# Altium PCB Peltier_activation_board.PcbDoc
Units mil, origin at the board's own origin, x right, y up, seen from the top; angles counter-clockwise.
Board outline 3150 x 3940 mil, 2 copper layers (Top Layer, Bottom Layer); 43 components, 27 nets, 108 pads, 0 vias.
Unrouted connection lines stored in the file: 2.
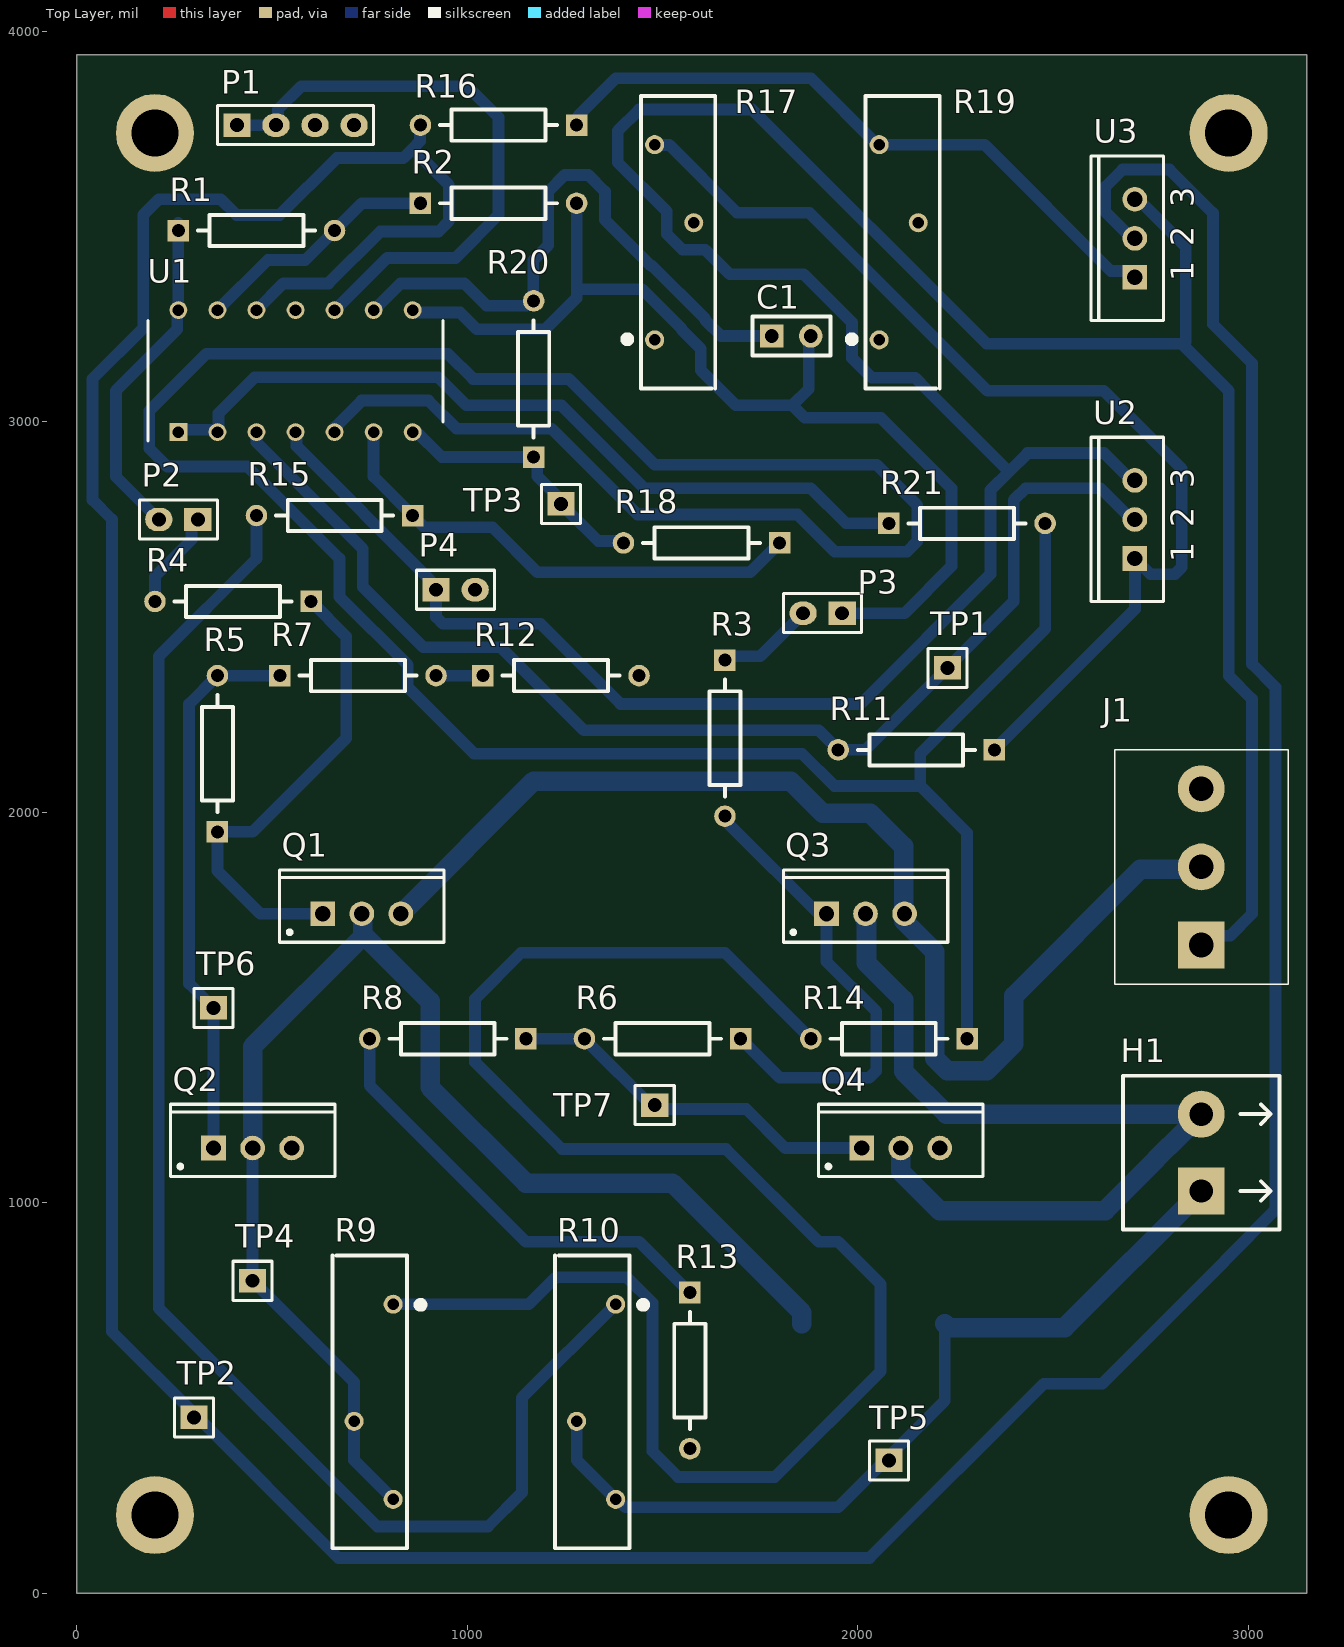
[diagram p0: Top Layer view]
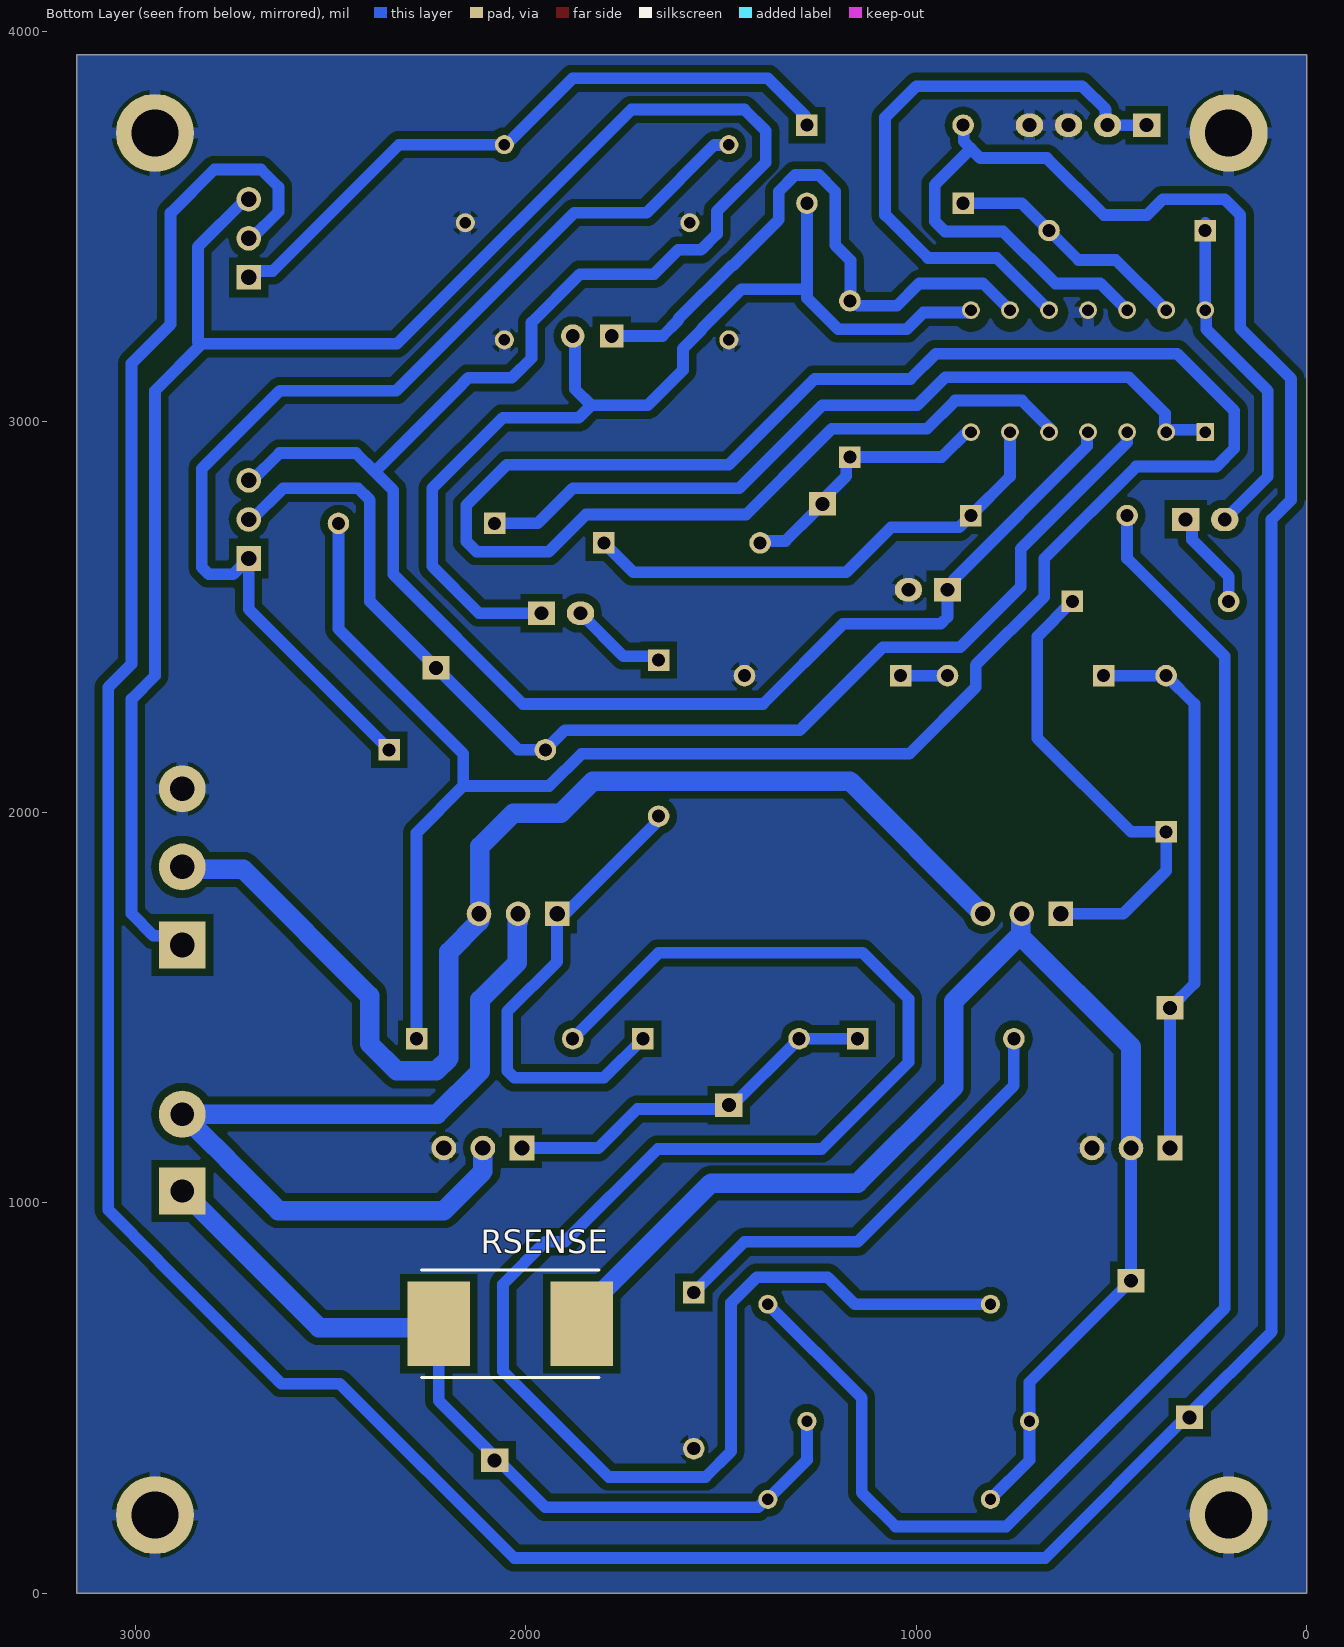
[diagram p1: Bottom Layer view, seen from below]
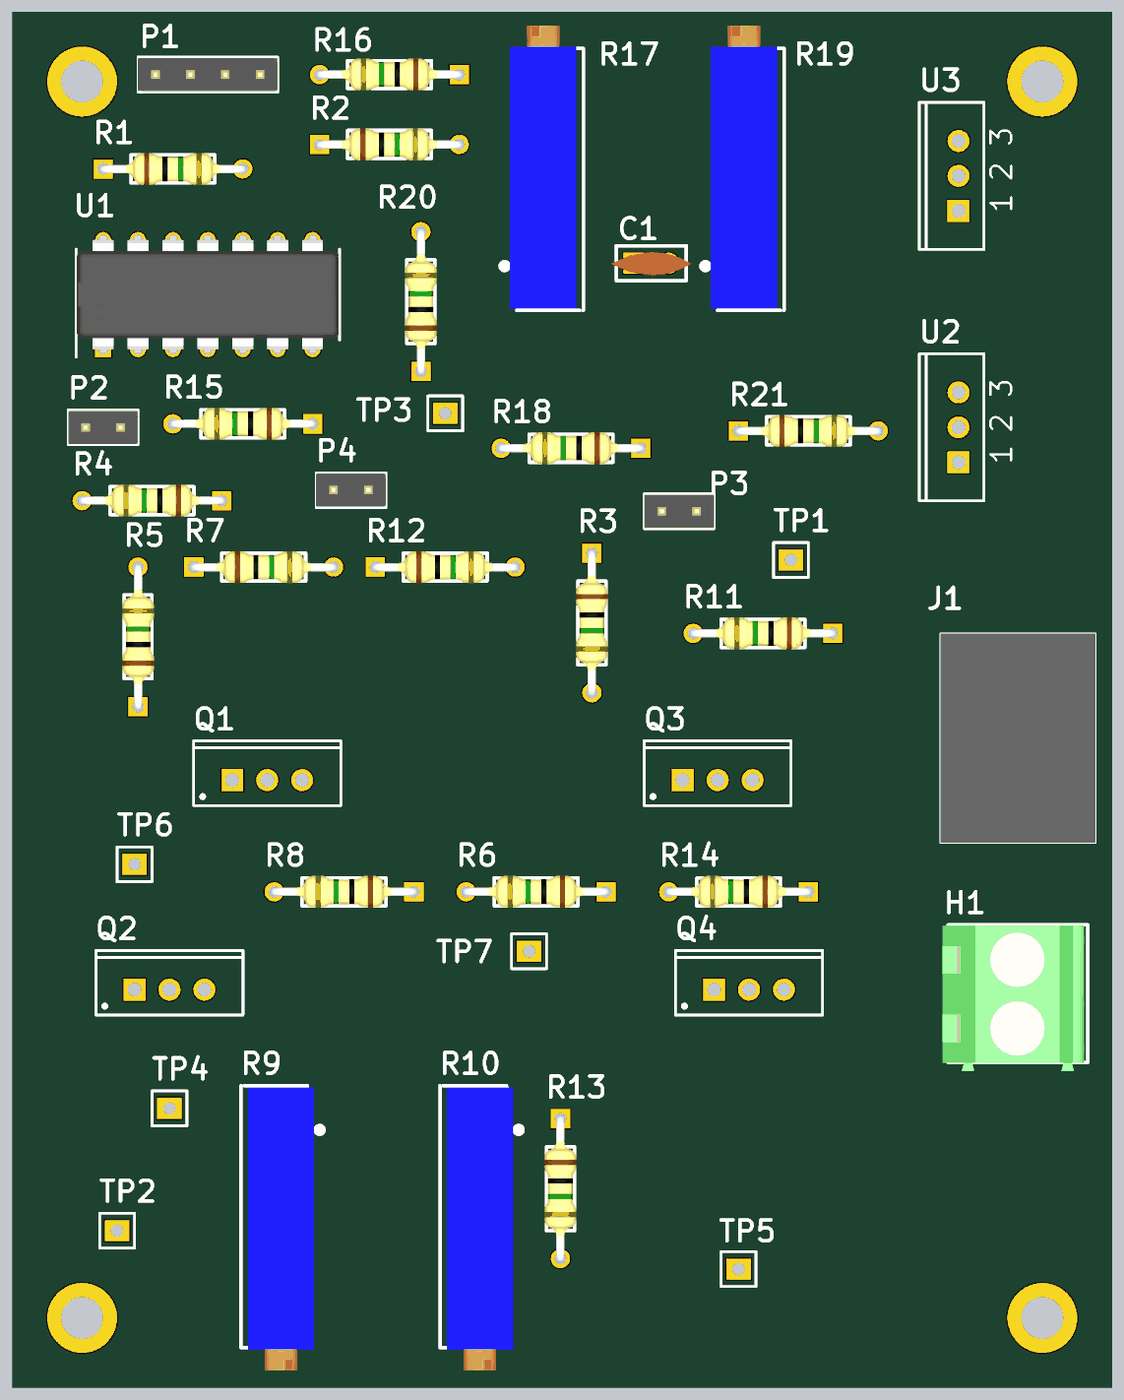
[diagram p2: 3D render of the assembled board from above, using the file's embedded part models]

## Layer stack, top to bottom
Top Solder: solder mask 0.4, Solder Resist, Dk 3.5
Top Layer: signal copper 1.4
Dielectric 1: dielectric 12.6, FR-4, Dk 4.8
Bottom Layer: signal copper 1.4
Bottom Solder: solder mask 0.4, Solder Resist, Dk 3.5

## Board outline
0,0 3150,0 3150,3940 0,3940

## Design rules (kind name [scope] priority, off if disabled: settings)
Clearance Clearance_1 [InNamedPolygon('GND_L02_P000')] p1: gap=20 ignorepadtopadclearanceinfootprint=FALSE
Clearance [All] p2: gap=30 ignorepadtopadclearanceinfootprint=FALSE
PolygonConnect PolygonConnect_1 [All vs IsNamedPolygon('GND_L02_P000')] p1: thpad.connectstyle=Relief thpad.reliefconductorwidth=30 thpad.reliefentries=4 thpad.polygonreliefangle="90 Angle" thpad.airgapwidth=10 smdpad.connectstyle=Direct smdpad.reliefconductorwidth=10 smdpad.reliefentries=4 smdpad.polygonreliefangle="90 Angle" smdpad.airgapwidth=10 via.connectstyle=Relief via.reliefconductorwidth=10 via.reliefentries=4 via.polygonreliefangle="90 Angle" via.airgapwidth=10
PolygonConnect [All] p2: connectstyle=Relief reliefconductorwidth=10 reliefentries=4 polygonreliefangle="90 Angle" airgapwidth=10
RoutingVias [All] p1: holewidth=28 width=50 viastyle="Through Hole" minholewidth=28 minwidth=50 maxholewidth=28 maxwidth=50
SolderMaskExpansion [All] p1: expansion=4 istentingtop=FALSE
Width [All] p1: maxlimit=50 minlimit=30 preferedwidth=30
30 further rules are at their usual default settings.

## Classes and differential pairs
component class Peltier_activation_board: C1 H1 P1 P2 P3 P4 Q1 Q2 Q3 Q4 R1 R2 R3 R4 R5 R6 R7 R8 R9 R10 R11 R12 R13 R14 R15 R16 R17 R18 R19 R20 R21 RSENSE U1 U2 U3

## Components (designator, comment, footprint, x,y, rotation, side; value= is the part's Value field where it differs from the comment)
C1 "Capacitor" C100-200-100 1780,3220 r0 top value=47nF
H1 "TEC" TB02 2880,1030 r90 top
J1 "TB010-508-03BE" TB01050803BE 2880,1660 r90 top
P1 "Header 4" HDR1X4 410,3760 r0 top
P2 "" HDR1X2 310,2750 r180 top
P3 "Header 2" HDR1X2 1960,2510 r180 top
P4 "FAN" HDR1X2 920,2570 r0 top
Q1 "IRF9Z34N" TO-220AB 730,1740 r0 top
Q2 "IRFZ34N" TO-220AB 450,1140 r0 top
Q3 "IRF9Z34N" TO-220AB 2020,1740 r0 top
Q4 "IRFZ34N" TO-220AB 2110,1140 r0 top
R1 "Resistor" R400-2.0mm 260,3490 r0 top value=10k
R2 "Resistor" R400-2.0mm 880,3560 r0 top value=10k
R3 "Resistor" R400-2.0mm 1660,2390 r270 top value=100
R4 "Resistor" R400-2.0mm 600,2540 r180 top value=100
R5 "Resistor" R400-2.0mm 360,1950 r90 top value=100k
R6 "Resistor" R400-2.0mm 1700,1420 r180 top value=100k
R7 "Resistor" R400-2.0mm 520,2350 r0 top value=150k
R8 "Resistor" R400-2.0mm 1150,1420 r180 top value=150k
R9 "3006P-1-103LF" 3006P_1 654.88,865 r270 top
R10 "3006P-1-103LF" 3006P_1 1224.88,865 r270 top
R11 "Resistor" R400-2.0mm 2350,2160 r180 top value=1k
R12 "Resistor" R400-2.0mm 1040,2350 r0 top value=22k
R13 "Resistor" R400-2.0mm 1570,770 r270 top value=22k
R14 "Resistor" R400-2.0mm 2280,1420 r180 top value=10k
R15 "Resistor" R400-2.0mm 860,2760 r180 top value=10k
R16 "Resistor" R400-2.0mm 1280,3760 r180 top value=1k
R17 "3006P-1-103LF" 3006P_1 1635.12,3085 r90 top
R18 "Resistor" R400-2.0mm 1800,2690 r180 top value=100k
R19 "3006P-1-103LF" 3006P_1 2210.12,3085 r90 top
R20 "Resistor" R400-2.0mm 1170,2910 r90 top value=1k
R21 "Resistor" R400-2.0mm 2080,2740 r0 top value=100k
RSENSE "WSR2R0100FEA" RESM11670X254N 2040,690 r0 bottom
TP1 "Comment" HDR1X1 2230,2370 r0 top
TP2 "Comment" HDR1X1 300,450 r0 top
TP3 "Comment" HDR1X1 1240,2790 r0 top
TP4 "Comment" HDR1X1 450,800 r0 top
TP5 "Comment" HDR1X1 2080,340 r0 top
TP6 "Comment" HDR1X1 350,1498.87 r0 top
TP7 "Comment" HDR1X1 1480,1250 r0 top
U1 "LM324AN" DIP794W56P254L1905H533Q14N 560,3130 r90 top
U2 "LM317KC" KC03 2710,2750 r90 top
U3 "LM317KC" KC03 2710,3470 r90 top

## Footprints (in the part's own frame and the unit in brackets; to place one, negate y for a bottom-side part, rotate by r counter-clockwise, add the part's x,y. Pads: shape width x height; smd on the part's side, far side on the other; paste and mask are expansions set on the pad)
3006P_1 [mm]
  round 1.24 hole 0.74: 1(3.175,3.94) 2(10.795,1.4) 3(15.875,3.94)
  silkscreen extent 0,0 19.05,5.92, body extent 0.12,0.5 20.69,5.32, height 6.27
C100-200-100 [mil]
  rect 60x60 hole 35: 1(0,0)
  round 60 hole 35: 2(100,0)
  silkscreen extent -50,-50 150,50, body extent -65,-35 165,32, height 245
DIP794W56P254L1905H533Q14N [mil]
  rect 45.63x45.63 hole 29.88: 1(-156.26,300)
  round 45.63 hole 29.88: 2(-156.26,200) 3(-156.26,100) 4(-156.26,0) 5(-156.26,-100) 6(-156.26,-200) 7(-156.26,-300) 8(156.26,-300) 9(156.26,-200) 10(156.26,-100) 11(156.26,0) 12(156.26,100) 13(156.26,200) 14(156.26,300)
  silkscreen extent -179,-377 130,377, body extent -167,-375 167,375, height 172
HDR1X1 [mil]
  rect 70x60 hole 35.43: 1(0,0)
  silkscreen extent -50,-50 50,50
HDR1X2 [mil]
  rect 70x60 hole 35.43: 1(0,0)
  oval 70x60 hole 35.43: 2(100,0)
  silkscreen extent -50,-50 150,50, body extent -50,-47 150,47, height 330
HDR1X4 [mil]
  rect 70x60 hole 35.43: 1(0,0)
  oval 70x60 hole 35.43: 2(100,0) 3(200,0) 4(300,0)
  silkscreen extent -50,-50 350,50, body extent -50,-47 350,47, height 330
KC03 [mm] "TO, Thru-Hole, Vertical, Heatsink Mounted; 3 In-Line Leads; Pitch 2.54 mm"
  rect 1.6x1.6 hole 1: 1(-2.54,0)
  round 1.6 hole 1: 2(0,0) 3(2.54,0)
  silkscreen extent -5.35,-1.85 5.35,2.85
R400-2.0mm [mm]
  rect 1.4x1.4 hole 0.85: 1(0,0)
  round 1.4 hole 0.85: 2(10.16,0)
  silkscreen extent 1.27,-1.02 8.89,1.02, body extent -0.3,-1.17 10.46,1.14, height 2.93
RESM11670X254N [mm]
  rect 4.05x5.5 smd: 1(-4.65,0) 2(4.65,0)
  silkscreen extent -5.78,-3.49 5.78,3.49, body extent -5.78,-3.49 5.78,3.49, height 2.41
TB02 [mil]
  rect 120x120 hole 60: 1(0,0)
  round 120 hole 60: 2(196.85,0)
  silkscreen extent -98,-200 295,200, body extent -123,-190 294,216, height 559
TB01050803BE [mil]
  rect 120x120 hole 62.99: 1(0,0)
  round 120 hole 62.99: 2(200,0) 3(400,0)
  silkscreen extent -100,-223 500,222, body extent -100,-223 500,222, height 720
TO-220AB [mm] "TO, Thru-Hole, Vertical, Heatsink Mounted; 3 In-Line Leads; Pitch 2.54 mm"
  rect 1.6x1.6 hole 1: 1(-2.54,0)
  round 1.6 hole 1: 2(0,0) 3(2.54,0)
  silkscreen extent -5.35,-1.85 5.35,2.85, body extent -5.4,-1.9 5.4,2.9, height 19.3

## Part data
C1: Voltage="100 V", LatestRevisionDate=17-Jul-2002, LatestRevisionNote="Re-released for DXP Platform.", PackageReference=RAD-0.3, Published=8-Jun-2000, Publisher="Altium Limited"
H1: library part Terminal_1x2, "Bloco terminal 1x2"
J1: "Connector", Manufacturer_Name="CUI Inc.", Mouser Part Number=490-TB010-508-03BE, Arrow Part Number=TB010-508-03BE, Arrow Price/Stock=https://www.arrow.com/en/products/tb010-508-03be/cui-devices?region=nac, Datasheet Link=https://componentsearchengine.com/Datasheets/1/TB010-508-03BE.pdf, Height=18.2mm, Manufacturer_Part_Number=TB010-508-03BE, Mouser Price/Stock=https://www.mouser.co.uk/ProductDetail/CUI-Devices/TB010-508-03BE?qs=vLWxofP3U2z1pw1VuAsf2Q%3D%3D
P1: "Header, 4-Pin", LatestRevisionDate=17-Jul-2002, LatestRevisionNote="Re-released for DXP Platform.", Publisher="Altium Limited"
P2 P4: library part "Header 2", "Header, 2-Pin", LatestRevisionDate=17-Jul-2002, LatestRevisionNote="Re-released for DXP Platform.", Publisher="Altium Limited"
P3: "Header, 2-Pin", LatestRevisionDate=17-Jul-2002, LatestRevisionNote="Re-released for DXP Platform.", Publisher="Altium Limited"
Q1 Q2 Q3 Q4: "HEXFET Power MOSFET", ComponentLink1Description="Manufacturer Link", ComponentLink1URL=http://www.irf.com/, ComponentLink2Description=Datasheet, DatasheetVersion=Aug-1997, LatestRevisionDate=17-Jul-2002, LatestRevisionNote="Re-released for DXP Platform.", Note="Pin 2 is electrically connected to pin 4.", PackageDescription="TO, Thru-Hole, Vertical, Heatsink Mounted; 3 In-Line Leads; Pitch 2.54 mm", PackageReference=TO-220AB, PackageVersion=Feb-1997, Published=8-Jun-2000, Publisher="Altium Limited"
  Q1 Q3: ComponentLink2URL=http://www.irf.com/product-info/datasheets/data/irf9z34n.pdf
  Q2 Q4: ComponentLink2URL=http://www.irf.com/product-info/datasheets/data/irfz34n.pdf
R1 R2 R3 R4 R5 R6 R7 R8 R11 R12 R13 R14 R15 R16 R18 R20 R21: Power="1/8 W", Tolerance=5%, LatestRevisionDate=17-Jul-2002, LatestRevisionNote="Re-released for DXP Platform.", PackageReference=AXIAL-0.3, Published=8-Jun-2000, Publisher="Altium Limited"
R9 R10 R17 R19: "Resistor", Manufacturer_Name=Bourns, Mouser Part Number=652-3006P-1-103-LF, Arrow Part Number=3006P-1-103LF, Arrow Price/Stock=https://www.arrow.com/en/products/3006p-1-103lf/bourns, Datasheet Link=http://www.bourns.com/docs/Product-Datasheets/3006.pdf, Manufacturer_Part_Number=3006P-1-103LF, Mouser Price/Stock=https://www.mouser.co.uk/ProductDetail/Bourns/3006P-1-103LF?qs=nlUCIKN74UBewXtW9dljOA%3D%3D
RSENSE: "Resistor", Manufacturer_Name=Vishay, Mouser Part Number=71-WSR2R0100FEA, Arrow Part Number=WSR2R0100FEA, Arrow Price/Stock=https://www.arrow.com/en/products/wsr2r0100fea/vishay, Datasheet Link=https://rs.componentsearchengine.com/Datasheets/2/WSR2R0100FEA.pdf, Height=2.537mm, Manufacturer_Part_Number=WSR2R0100FEA, Mouser Price/Stock=https://www.mouser.com/Search/Refine.aspx?Keyword=71-WSR2R0100FEA
U1: "Quadruple Operational Amplifier", ComponentLink1Description="Manufacturer Link", ComponentLink1URL=http://www.ti.com/, ComponentLink2Description=Datasheet, ComponentLink2URL=http://www-s.ti.com/sc/ds/lm324.pdf, DatasheetVersion=Jan-1989, LatestRevisionDate=04-Mar-2005, LatestRevisionNote="Stylized 3D Model Added.", PackageDescription="DIP; 14 Leads; Row Spacing 7.62 mm; Pitch 2.54 mm", PackageReference=N014, PackageVersion=Oct-1995, Published=15-Apr-2002, Publisher="Altium Limited"
U2 U3: "3-Terminal Adjustable Regulator", ComponentLink1Description="Manufacturer Link", ComponentLink1URL=http://www.ti.com/, DatasheetVersion=Feb-1988, Note="Pin 2 is electrically connected to tab", PackageDescription="TO, Thru-Hole, Vertical, Heatsink Mounted; 3 In-Line Leads; Pitch 2.54 mm", PackageReference=KC03, PackageVersion=Sep-1995, Published=15-Apr-2002, Publisher="Altium Limited"

## Free pads (board coordinates)
  round 200 hole 120: 1(200,3740) 2(2950,3740) 3(200,200) 4(2950,200)

## Nets (pads, with @x,y where several pads share a name; then routed paths per layer and width w, separated by ;. In a path a pad name is that pad's centre, name@x,y a point inside that pad or via, vN(x,y) a via of type N, cw(c..) or ccw(c..) an arc to the next point about the centre after c; other vN are vias at no path point)
6V: J1.2 Q1.3 Q3.3 | length 3058
  Bottom Layer w50: Q1.3 1170,2080 1828.39,2080 1910.96,1997.43 2032.57,1997.43 2117.51,1912.49 2117.51,1722.49 2120,1720 2197.44,1642.56 2197.44,1369.66 2229.66,1337.44 2330.34,1337.44 2400,1407.1 2400,1530 2723.56,1853.56 2873.56,1853.56 J1.2
+12: J1.1 P4.1 U1.4 U2.3 U3.3 | length 8267.6
  Bottom Layer w30: U1.4@560,2980 562.7,2977.3 562.7,2937.3 905.47,2594.53 905.47,2584.53 P4.1 920,2500.13 937.57,2482.56 1187.44,2482.56 1392.56,2277.44 2007.44,2277.44 2340,2610 2340,2824.85 2387.57,2872.43 ; U2.3 2701.07,2850 2631.07,2920 2435.15,2920 2387.57,2872.43 ; U3.3 2718.18,3570 2840,3448.18 2840,3205.15 ; J1.1 2904.06,1684.06 2954.06,1684.06 3010,1740 3010,2290 2950,2350 2950,3080 2830,3200 2330,3200 1730,3800 1440,3800 1385.63,3745.63 1385.63,3664.37 1510.59,3539.41 1510.59,3481.25 1551.25,3440.59 1609.41,3440.59 1671.97,3378.03 1861.97,3378.03 1985.59,3254.41 1985.59,3163.24 2035.92,3112.92 2147.08,3112.92 2178.74,3081.26 2387.57,2872.43
GND: J1.3 P1.3 P1.4 P4.2 pad.1 pad.2 pad.3 pad.4 Q2.3 Q4.3 R12.2 R13.2 R17.1 R17.2 R19.1 R19.2 U1.11 | length 8.2
  Bottom Layer w30: Q2.3@550,1131.82 Q2.3
NetC1_1: C1.1 R20.2 U1.9 | length 1566.3
  Bottom Layer w30: U1.9@760,3280 760,3285.4 829.13,3354.53 992.3,3354.53 1049.39,3297.44 1150.64,3297.44 R20.2@1161.98,3308.78 ; R20.2 1168.73,3311.27 1168.73,3413.88 1207.44,3452.59 1207.44,3590.05 1249.95,3632.56 1310.05,3632.56 1352.56,3590.05 1352.56,3517.44 1470,3400 1473.01,3400 1609.41,3263.6 1609.41,3260.59 1650,3220 C1.1
NetQ1_1: Q1.1 R4.1 R5.1 | length 1232.3
  Bottom Layer w30: R4.1 690,2450 690,2190 450,1950 R5.1 360,1850 470,1740 Q1.1
NetQ1_2: Q1.2 Q2.2 R9.2 R9.3 RSENSE.1 TP4.1 | length 3450.4
  Bottom Layer w30: Q2.2 TP4.1 710,540 R9.2 710,340 R9.3
  Bottom Layer w50: Q2.2 450,1400 732.49,1682.49 732.49,1687.51 ; Q1.2 732.49,1737.51 732.49,1687.51 ; RSENSE.1 1856.93,718.54 1525.47,1050 1150,1050 904.54,1295.46 904.54,1515.46 732.49,1687.51
NetQ2_1: Q2.1 R5.2 R7.1 TP6.1 | length 1426
  Bottom Layer w30: Q2.1 TP6.1 287.44,1561.43 287.44,2277.44 R5.2 R7.1
NetQ3_1: Q3.1 R3.2 R6.1 | length 1206.4
  Bottom Layer w30: R3.2@1654.81,1985.19 1920,1720 1920,1617.67 2047.44,1490.23 2047.44,1337.57 2029.87,1320 1800,1320 R6.1
NetQ4_1: Q4.1 R6.2 R8.1 TP7.1 | length 976
  Bottom Layer w30: R8.1 R6.2 1480,1240 1714.85,1240 1814.85,1140 Q4.1
NetR1_2: R1.2 R2.1 U1.13 | length 639.1
  Bottom Layer w30: U1.13@360,3280 360,3285.4 489.13,3414.53 584.53,3414.53 730,3560 R2.1
NetR7_2: R7.2 R12.1 | length 120
  Bottom Layer w30: R7.2 R12.1
NetR8_2: R8.2 R13.1 | length 1159.5
  Bottom Layer w30: R8.2 750,1300 1150,900 1440,900 R13.1
NetR9_1: R9.1 R14.2 | length 4484
  Bottom Layer w30: R9.1 1157.22,740 1226.63,809.41 1408.75,809.41 1474.35,743.81 1474.35,363.04 1539.95,297.44 1787.44,297.44 2058.6,568.6 2058.6,791.4 1950,900 1900,900 1662.5,1137.5 1242.5,1137.5 1020,1360 1020,1522.43 1137.57,1640 1660,1640 R14.2
NetR10_1: R10.1 R15.2 | length 3913.1
  Bottom Layer w30: R15.2 460,2650 210,2400 210,730 769.41,170.59 1053.02,170.59 1140,257.57 1140,500 R10.1
NetR11_1: R11.1 R17.3 U2.1 | length 2729.2
  Bottom Layer w30: R17.3 1480.7,3709.3 1517.46,3709.3 1690.86,3535.9 1876.32,3535.9 2332.22,3080 2630,3080 2830,2880 2830,2627.57 2812.43,2610 2750,2610 U2.1 2710,2520 R11.1
NetR14_1: R14.1 R21.2 U1.5 | length 8000.9
  Bottom Layer w30: U1.5@660,2980 660,2985.4 729.13,3054.53 900.62,3054.53 972.59,2982.56 1216.2,2982.56 1248.76,2950 1436.2,2762.56 1846.2,2762.56 1941.32,2667.44 2126.2,2667.44 2152.56,2693.8 2152.56,2786.2 2048.76,2890 1480,2890 1260,3110 1014.85,3110 950.33,3174.53 331.83,3174.53 185.47,3028.17 185.47,2931.83 231.79,2885.52 437.1,2885.52 672.56,2650.05 672.56,2552.29 847.44,2377.41 847.44,2319.95 1017.39,2150 1857.39,2150 1939.96,2067.43 2160,2067.43 ; R14.1 2280,1947.43 2160,2067.43 ; R21.2 2480,2470 2160,2150 2160,2067.43
NetR15_1: R15.1 R18.1 U1.6 | length 1292.5
  Bottom Layer w30: U1.6@760,2980 760,2860 R15.1 890,2730 1064.6,2730 1179.6,2615 1725,2615 R18.1
NetR16_1: R16.1 R19.3 U3.1 | length 1702.7
  Bottom Layer w30: R16.1 1284.38,3764.38 1284.38,3784.38 1380,3880 1880.44,3880 2050.44,3710 R19.3 2324.85,3710 2648.36,3386.5 2693.5,3386.5 U3.1
NetR21_1: R21.1 U1.1 U1.2 | length 2054
  Bottom Layer w30: U1.1@260,2980 360,2980 362.97,2982.97 362.97,3022.43 455.07,3114.53 925.47,3114.53 997.44,3042.56 1241.05,3042.56 1453.61,2830 1880,2830 1970,2740 R21.1
TEC1: H1.1 R10.2 R10.3 RSENSE.2 TP5.1 | length 2208.9
  Bottom Layer w30: R10.2 1280,340 R10.3 1385.09,240 1405.09,220 1950,220 2223.07,493.07 RSENSE.2
  Bottom Layer w50: RSENSE.2 2233.07,680 2530,680 H1.1
TEC2: H1.2 Q3.2 Q4.2 | length 2206.5
  Bottom Layer w50: Q3.2@2020,1720 2022.49,1717.51 2022.49,1614.18 2117.44,1519.23 2117.44,1336.52 2227.11,1226.85 H1.2 2880,1226.43 2798.57,1145 2797.22,1145 2765,1112.78 2765,1111.43 2633.57,980 2210,980 2110,1080 Q4.2
V_CTRL: P1.1 P1.2 U1.10 | length 1541.8
  Bottom Layer w30: P1.1 P1.2 515.17,3765.17 515.17,3800.22 574.95,3860 1000,3860 1080,3780 1080,3530 970,3420 794.6,3420 660,3285.4 U1.10@660,3280
VGATE_1: P2.1 P2.2 R1.1 R4.2 U1.14 | length 1128.2
  Bottom Layer w30: R4.2 200,2604.11 293.62,2697.74 293.62,2735 308.62,2750 P2.1 ; P2.2 100,2860 100,3080 257.3,3237.3 257.3,3277.3 260,3280 R1.1@260,3510
VGATE_2: C1.2 P3.1 P3.2 R2.2 R3.1 U1.8 | length 2901.2
  Bottom Layer w30: U1.8@860,3280 981.98,3280 1024.53,3237.44 1200.05,3237.44 1280,3317.39 1280,3340 ; R2.2 1280,3340 ; R3.1@1650,2400 1750,2400 P3.2 ; C1.2 1874.26,3214.26 1874.26,3084.26 1832.43,3042.43 ; P3.1 2120,2510 2240,2630 2240,2830 2059.55,3010.45 1864.41,3010.45 1832.43,3042.43 ; 1280,3340 1448.16,3340 1549.41,3238.75 1549.41,3235.74 1597.74,3187.41 1597.74,3132.26 1687.5,3042.5 1742.65,3042.5 1742.72,3042.43 1832.43,3042.43
VREF_3V: R11.2 TP1.1 U1.3 U2.2 | length 3122.7
  Bottom Layer w30: U1.3 460,2947.47 732.56,2674.91 732.56,2577.15 887.15,2422.56 1086.2,2422.56 1298.76,2210 1900,2210 R11.2 2020,2160 TP1.1 2400,2540 2400,2800 2430,2830 2621.82,2830 2701.82,2750 U2.2
VREF_4V5: R16.2 TP2.1 U1.12 U3.2 | length 11333
  Bottom Layer w30: U1.12@460,3280 460,3285.4 529.13,3354.53 644.28,3354.53 777.19,3487.44 926.2,3487.44 952.56,3513.8 952.56,3607.44 860,3700 ; R16.2 878.69,3758.69 878.69,3721.31 878.69,3718.69 860,3700 ; U3.2 2701.82,3470 2633.5,3538.31 2633.5,3601.69 2678.31,3646.5 2798.36,3646.5 2910,3534.85 2910,3250 3010,3150 3010,2380 3070,2320 3070,981.53 2940,851.53 2940,850 2626.45,536.45 2476.45,536.45 2030,90 670,90 307.5,452.5 90,670 90,2750 40,2800 40,3110 170,3240 170,3530 210,3570 368.76,3570 408.76,3530 519.75,3530 665.38,3675.63 835.63,3675.63 860,3700
VSENSE: R18.2 R20.1 TP3.1 U1.7 | length 691.7
  Bottom Layer w30: U1.7@856.07,2976.07 868.48,2976.07 934.55,2910 R20.1 1179.38,2900.62 1179.38,2860.62 TP3.1@1245,2795 ; TP3.1 1245,2790 1260,2775 1260,2770 1335.19,2694.81 1395.19,2694.81 R18.2

## Polygon pours and split planes (outlines as drawn)
GND on Bottom Layer "GND_L02_P000" (solid, remove dead copper, pour order 0): 3150,0 0,0 0,3940 3150,3940

## Silkscreen, mask and mechanical layers (free items; w line width, h text height)
Mechanical 1:
  the board outline again, w20

## Dimensions
200,3740 to 0,3940 on OUTLINE
200,200 to 2950,200 on OUTLINE
2950,200 to 2950,3740 on OUTLINE
200,200 to 0,0 on OUTLINE
2950,200 to 3150,0 on OUTLINE
810,740 to 1380,740 on OUTLINE
1480,3210 to 2055,3210 on OUTLINE
0,0 to 3150,0 on OUTLINE
3160,3940 to 3150,0 on OUTLINE
450,1140 to 2110,1140 on OUTLINE
730,1740 to 2020,1740 on OUTLINE

## Text inside footprints (layer, text, board x,y; h text height)
U2: Top Overlay "3" at 2860.59,2830.32 h59.06 r90; Top Overlay "1" at 2860.59,2640.16 h59.06 r90; Top Overlay "2" at 2860.59,2730.32 h59.06 r90
U3: Top Overlay "3" at 2860.59,3550.31 h59.06 r90; Top Overlay "1" at 2860.59,3360.16 h59.06 r90; Top Overlay "2" at 2860.59,3450.31 h59.06 r90